# EAGLE board parts-layout (EAGLE 5.12)

Size 100 x 80 mm. Coordinates in mm from the lower left corner, seen from the top.
Outline: 0,0 100,0 100,80 0,80 0,0
Copper layers (1*16): Top 0.035mm / dielectric 1.5mm / Bottom 0.035mm
Design rules "default": minimum track width 10mil, minimum drill 24mil, track to track 8mil, track to pad 8mil, pad to pad 8mil, via to via 8mil, smd to smd 8mil, copper to edge 40mil, drill to drill 8mil, minimum pad ring 10mil, minimum via ring 8mil, stop-mask expansion 4mil, vias tented up to drill 0mil, thermal gap 10mil

## Footprints (pad centres in the part's own frame; a part is rotated, then mirrored left to right if it is on the bottom)
E2,5-5 = drill 0.813 pad 1.6 round: + -1.27,0 | drill 0.813 pad 1.6 octagon: - 1.27,0
E5-10,5 = drill 1.016 pad 2.54 round: + -2.54,0 | drill 1.016 pad 2.54 octagon: - 2.54,0
DO41-7.6 = drill 1.1 pad 1.7 round: A 3.81,0; C -3.81,0
DO35-7 = drill 0.813 long: A 3.81,0; C -3.81,0
2,54/1,0 = drill 1.016 pad 2.54 octagon: 1 0,0
DIL08 = drill 0.813 pad 1.27 round: 1 -3.81,-3.81; 2 -1.27,-3.81; 3 1.27,-3.81; 4 3.81,-3.81; 5 3.81,3.81; 6 1.27,3.81; 7 -1.27,3.81; 8 -3.81,3.81
2X05 = drill 1.016 octagon: 1 -5.08,-1.27; 2 -5.08,1.27; 3 -2.54,-1.27; 4 -2.54,1.27; 5 0,-1.27; 6 0,1.27; 7 2.54,-1.27; 8 2.54,1.27; 9 5.08,-1.27; 10 5.08,1.27
1X06 = drill 1.016 long: 1 -6.35,0; 2 -3.81,0; 3 -1.27,0; 4 1.27,0; 5 3.81,0; 6 6.35,0
1X03 = drill 1.016 long: 1 -2.54,0; 2 0,0; 3 2.54,0
TQ2 = drill 1 round: 1 -5.08,-3.81; 2 -2.54,-3.81; 3 0,-3.81; 4 2.54,-3.81; 5 5.08,-3.81; 6 5.08,3.81; 7 2.54,3.81; 8 0,3.81; 9 -2.54,3.81; 10 -5.08,3.81
LP0250 = smd 2.794 x 2.921: P$1 0,7.62; P$2 0,-7.62
DPAK = smd 1 x 1.6: 1 -2.28,-7.34; 3 2.28,-7.34 | smd 5.4 x 6.2: 4 0,-0.04
0207/12 = drill 0.813 octagon: 1 -6.35,0; 2 6.35,0
ARDUINO-BPLACE = drill 1 pad 1.676 octagon: 3V 35.56,2.54; 5V 38.1,2.54; A0 50.8,2.54; A1 53.34,2.54; A2 55.88,2.54; A3 58.42,2.54; A4 60.96,2.54; A5 63.5,2.54; AREF 23.876,50.8; D0 63.5,50.8; D1 60.96,50.8; D2 58.42,50.8; D3 55.88,50.8; D4 53.34,50.8; D5 50.8,50.8; D6 48.26,50.8; D7 45.72,50.8; D8 41.656,50.8; D9 39.116,50.8; D10 36.576,50.8; D11 34.036,50.8; D12 31.496,50.8; D13 28.956,50.8; GND 26.416,50.8; GND1 43.18,2.54; GND2 40.64,2.54; RESET 33.02,2.54; VIN 45.72,2.54 | hole 3.2: 15.24,50.8; 66.04,35.56; 13.97,2.54
SDIP6 = smd 0.8 x 1.7: P$1 -1.27,-4.4; P$2 0,-4.4; P$3 1.27,-4.4; P$4 1.27,4.4; P$5 0,4.4; P$6 -1.27,4.4

## Placement (x,y rotation side)
C1  22uF  [E2,5-5]  25.4,33.02 180 top
C2  220uF  [E5-10,5]  5.08,40.64 90 top
D1  1N5819-T  [DO41-7.6]  22.86,21.59 90 top
D3  1N4148DO35-7  [DO35-7]  72.39,39.37 180 top
D4  1N4148DO35-7  [DO35-7]  91.44,22.86 90 top
EXT_24  [2,54/1,0]  3.81,63.5 0 top
EXT_GND  [2,54/1,0]  3.81,68.58 0 top
IC2  LM2574N-5.0  [DIL08]  17.78,41.91 0 top
JP1  [2X05]  55.88,71.12 270 top
JP2  [2X05]  40.64,71.12 270 top
JP3  [2X05]  26.67,71.12 270 top
JP4  [2X05]  12.7,71.12 270 top
JP5  [1X06]  41.91,26.67 0 top
JP6  [1X03]  66.04,67.31 270 top
JP7  [1X03]  76.2,67.31 270 top
JP8  [1X03]  85.09,67.31 270 top
JP9  [1X03]  93.98,67.31 270 top
K1  TQ2-5V  [TQ2]  76.2,22.86 180 top
L1  L0250.NLT  [LP0250]  10.16,24.13 270 top
PAD5  [2,54/1,0]  77.47,31.75 0 top
PAD6  [2,54/1,0]  72.39,31.75 0 top
Q3  IRF3806  [DPAK]  62.23,49.53 90 top
Q4  IRF3806  [DPAK]  81.28,49.53 90 top
R1  [0207/12]  34.29,7.62 90 top
R2  [0207/12]  44.45,39.37 90 top
R3  680K  [0207/12]  73.66,49.53 270 top
R4  680K  [0207/12]  92.71,49.53 270 top
U$1  ARDUINO-BPLACE  [ARDUINO-BPLACE]  -16.51,3.81 0 top
U$2  TLP716  [SDIP6]  36.83,40.64 180 top
U$3  TLP716  [SDIP6]  50.8,40.64 0 top

## Library data of the parts
C1 C2 R1-R4 = rcl
D1 D3 D4 = diode
EXT_24 EXT_GND PAD5 PAD6 = wirepad
IC2 = linear
JP1-JP9 = pinhead
K1 = relay; MF: AROMAT/ MATSUSHITA; MPN: TQ2-5V; OC_FARNELL: 1175716; OC_NEWARK: 64K3200
L1 Q3 Q4 = typewriter-project
U$1 = adafruit
U$2 U$3 = optoz

## Nets
3V: U$1.3V
+24V: C1.+ D3.C EXT_24.1 IC2.5 JP1.9 JP1.10 JP2.9 JP2.10 JP3.9 JP3.10 JP4.9 JP4.10 K1.3 PAD5.1
BRAKE: Q4.1 R4.2
CLK: JP1.5 JP2.5 JP3.5 JP4.5 U$1.D6
D1: JP1.3 U$1.D2
D2: JP2.3 U$1.D3
D3: JP3.3 U$1.D4
D4: JP4.3 U$1.D5
GND: C1.- C2.- D1.A EXT_GND.1 IC2.2 IC2.3 IC2.4 JP1.7 JP1.8 JP2.7 JP2.8 JP3.7 JP3.8 JP4.7 JP4.8 JP6.3 JP7.3 JP8.3 JP9.3 Q3.3 Q4.3 R2.1 R3.1 R4.1 U$1.GND U$1.GND1 U$3.P$3
GND2: U$1.GND2
MOTOR: Q3.1 R3.2 U$1.D9
N$1: D1.C IC2.7 L1.P$1
N$51: JP5.1 R1.1 U$2.P$3
N$53: D3.A K1.4 PAD6.1 Q3.4
N$56: D4.A K1.1 Q4.4
N$59: JP5.3 U$2.P$5
N$60: JP5.5 U$2.P$6
N$61: JP5.4 U$3.P$1
N$62: R1.2 U$3.P$2
N$63: R2.2 U$2.P$2
OE: JP1.6 JP2.6 JP3.6 JP4.6 U$1.D8
RCLK: JP1.4 JP2.4 JP3.4 JP4.4 U$1.D7
RX: U$1.D0 U$3.P$6
SW1: JP6.2 U$1.A2
SW2: JP7.2 U$1.A3
SW3: JP8.2 U$1.A4
SW4: JP9.2 U$1.A5
TX: U$1.D1 U$2.P$1
VCC: C2.+ D4.C IC2.1 JP1.1 JP2.1 JP3.1 JP4.1 JP6.1 JP7.1 JP8.1 JP9.1 K1.10 L1.P$2 U$1.5V U$3.P$5
VIN: U$1.VIN

## Tracks (layer width: path | path; a pad name or v marks a point on that pad's centre or on a via)
+24V  (13 unrouted)
BRAKE  (1 unrouted)
CLK  (4 unrouted)
D1  (1 unrouted)
D2  (1 unrouted)
D3  (1 unrouted)
D4  (1 unrouted)
GND  (26 unrouted)
MOTOR  (2 unrouted)
N$1  (2 unrouted)
N$51  (2 unrouted)
N$53  (3 unrouted)
N$56  (2 unrouted)
N$59  (1 unrouted)
N$60  (1 unrouted)
N$61  (1 unrouted)
N$62  (1 unrouted)
N$63  (1 unrouted)
OE  (4 unrouted)
RCLK  (4 unrouted)
RX  (1 unrouted)
SW1  (1 unrouted)
SW2  (1 unrouted)
SW3  (1 unrouted)
SW4  (1 unrouted)
TX  (1 unrouted)
VCC  (14 unrouted)